# EAGLE board Vorlage ATmega2560-16AU (EAGLE 9.6.2)

Size 160 x 100 mm. Coordinates in mm from the lower left corner, seen from the top.
Outline: 150,0 160,0 160,100
Outline: 150,0 0,0 0,100 150,100 150,0
Copper layers (1*16): Top 0.035mm / dielectric 1.5mm / Bottom 0.035mm
Design rules "default": minimum track width 6mil, minimum drill 0.35mm, track to track 6mil, track to pad 6mil, pad to pad 6mil, via to via 6mil, smd to smd 6mil, copper to edge 40mil, drill to drill 6mil, minimum pad ring 10mil, minimum via ring 8mil, stop-mask expansion 4mil, vias tented up to drill 0mil, thermal gap 10mil
Net classes: 0 default: width 0.254 mm, drill 0.508 mm; 1 POWER: width 1.016 mm, drill 1.016 mm

## Footprints (pad centres in the part's own frame; a part is rotated, then mirrored left to right if it is on the bottom)
LSP11 = drill 0.6 pad 1.016 octagon: MP 0,0
CHIPLED_1206 = smd 1.5 x 1.5: A 0,-1.75; C 0,1.75
C1206 = smd 1.6 x 1.8: 1 -1.4,0; 2 1.4,0
C0805K = smd 1.3 x 1.6: 1 -1,0; 2 1,0
UD-6,3X5,8_NICHICON = smd 3.556 x 1: + 3.62,0; - -3.62,0
C0805 = smd 1.3 x 1.5: 1 -0.95,0; 2 0.95,0
SOD123 = smd 1.4 x 1.4: A 1.9,0; C -1.9,0
F1206 = smd 1.6 x 1.803: 1 -1.422,0; 2 1.422,0
SO14 = smd 0.66 x 2.032: 1 -3.81,-3.073; 2 -2.54,-3.073; 3 -1.27,-3.073; 4 0,-3.073; 5 1.27,-3.073; 6 2.54,-3.073; 7 3.81,-3.073; 8 3.81,3.073; 9 2.54,3.073; 10 1.27,3.073; 11 0,3.073; 12 -1.27,3.073; 13 -2.54,3.073; 14 -3.81,3.073
TQFP100 = smd 1.5 x 0.3: 1 -8,6; 2 -8,5.5; 3 -8,5; 4 -8,4.5; 5 -8,4; 6 -8,3.5; 7 -8,3; 8 -8,2.5; 9 -8,2; 10 -8,1.5; 11 -8,1; 12 -8,0.5; 13 -8,0; 14 -8,-0.5; 15 -8,-1; 16 -8,-1.5; 17 -8,-2; 18 -8,-2.5; 19 -8,-3; 20 -8,-3.5; 21 -8,-4; 22 -8,-4.5; 23 -8,-5; 24 -8,-5.5; 25 -8,-6; 51 8,-6; 52 8,-5.5; 53 8,-5; 54 8,-4.5; 55 8,-4; 56 8,-3.5; 57 8,-3; 58 8,-2.5; 59 8,-2; 60 8,-1.5; 61 8,-1; 62 8,-0.5; 63 8,0; 64 8,0.5; 65 8,1; 66 8,1.5; 67 8,2; 68 8,2.5; 69 8,3; 70 8,3.5; 71 8,4; 72 8,4.5; 73 8,5; 74 8,5.5; 75 8,6 | smd 0.3 x 1.5: 26 -6,-8; 27 -5.5,-8; 28 -5,-8; 29 -4.5,-8; 30 -4,-8; 31 -3.5,-8; 32 -3,-8; 33 -2.5,-8; 34 -2,-8; 35 -1.5,-8; 36 -1,-8; 37 -0.5,-8; 38 0,-8; 39 0.5,-8; 40 1,-8; 41 1.5,-8; 42 2,-8; 43 2.5,-8; 44 3,-8; 45 3.5,-8; 46 4,-8; 47 4.5,-8; 48 5,-8; 49 5.5,-8; 50 6,-8; 76 6,8; 77 5.5,8; 78 5,8; 79 4.5,8; 80 4,8; 81 3.5,8; 82 3,8; 83 2.5,8; 84 2,8; 85 1.5,8; 86 1,8; 87 0.5,8; 88 0,8; 89 -0.5,8; 90 -1,8; 91 -1.5,8; 92 -2,8; 93 -2.5,8; 94 -3,8; 95 -3.5,8; 96 -4,8; 97 -4.5,8; 98 -5,8; 99 -5.5,8; 100 -6,8
SOT23-W = smd 1.27 x 1.524: 1 -1.1,-1.554; 2 1.1,-1.554 | smd 1.778 x 1.524: 3 0,1.554
SO16 = smd 0.66 x 2.032: 1 -4.445,-3.073; 2 -3.175,-3.073; 3 -1.905,-3.073; 4 -0.635,-3.073; 5 0.635,-3.073; 6 1.905,-3.073; 7 3.175,-3.073; 8 4.445,-3.073; 9 4.445,3.073; 10 3.175,3.073; 11 1.905,3.073; 12 0.635,3.073; 13 -0.635,3.073; 14 -1.905,3.073; 15 -3.175,3.073; 16 -4.445,3.073
SOT23-DBV = smd 0.55 x 1.2: 1 -0.95,-1.3; 2 0,-1.3; 3 0.95,-1.3; 4 0.95,1.3; 5 -0.95,1.3
JP2 = drill 0.914 long: 1 -2.54,0; 2 0,0; 3 2.54,0
SAMTEC_FTS-105-01-L-D = drill 0.7 pad 1.067 square: 1 -5.08,-1.27 | drill 0.7 pad 1.067: 2 -5.08,0; 3 -3.81,-1.27; 4 -3.81,0; 5 -2.54,-1.27; 6 -2.54,0; 7 -1.27,-1.27; 8 -1.27,0; 9 0,-1.27; 10 0,0
L2825P = smd 1.4 x 2.4: 1 -1.2,0; 2 1.2,0
EADIP203-4SMD = smd 1.67 x 0.89: 1 -29.38,-9.92; 2 -26.13,-7.92; 3 -29.38,-5.92; 4 -26.13,-3.92; 5 -29.38,-1.92; 6 -26.13,0.08; 7 -29.38,2.08; 8 -26.13,4.08; 9 -29.38,6.08; 10 34.12,6.08; 11 37.37,4.08; 12 34.12,2.08; 13 37.37,0.08; 14 34.12,-1.92; 15 37.37,-3.92; 16 34.12,-5.92; 17 37.37,-7.92; 18 34.12,-9.92
HC49UP = smd 5.334 x 1.93: 1 -4.826,0; 2 4.826,0
TC38H = drill 0.813: 1 -1.27,0; 2 1.27,0
SOT23 = smd 1 x 1.4: 1 -0.95,-1.1; 2 0.95,-1.1; 3 0,1.1
EVUF = drill 1.1 pad 1.676: 1 -2.5,-7; 2 0,-7; 3 2.5,-7 | drill 2.2 square: M1 4.5,0; M2 -4.5,0
R1206 = smd 1.6 x 1.803: 1 -1.422,0; 2 1.422,0
3223G = smd 2 x 0.9: 1 -2.2,1.4; 3 -2.2,-1.4 | smd 2 x 1.3: 2 2.2,0
R0805 = smd 1.3 x 1.5: 1 -0.95,0; 2 0.95,0
LED_MIT_DIFUSOR = smd 0.7 x 1.65: 1 -0.95,-1.675; 3 0.95,-1.675; 4 0.95,1.675; 6 -0.95,1.675 | smd 0.6 x 1.65: 2 0,-1.675; 5 0,1.675 | hole 1.5: -3.175,0; 3.175,0
TS42_4PAD = smd 2.54 x 1.4: 1 -4.454,2.25; 2 4.454,2.25; 3 -4.454,-2.25; 4 4.454,-2.25
SPDT_5MM = drill 1 pad 1.422 long: 1 0,-2.5; 2 0,0; 3 0,2.5
TO127P254X495-3P = drill 0.991: 1 -2.54,-2.54 | drill 0.991 square: 2 -1.27,0; 3 0,-2.54
RKJXV1224005 = drill 1.2 pad 1.8: 1 -3.25,-5.75; 2 -3.25,-10.25; 3 3.25,-5.75; 4 3.25,-10.25; 5 8.73,-2.5; 6 8.73,0; 7 8.73,2.5; 8 2.5,8.73; 9 0,8.73; 10 -2.5,8.73 | drill 1.5 pad 2.25: 11 -6.325,5; 12 6.325,5; 15 -6.325,-5; 16 6.325,-5
USB-C = smd 0.762 x 2: 1 -2.75,2.848; 6 2.75,2.848 | smd 0.559 x 2: 2 -1.5,2.848; 3 -0.5,2.848; 4 0.5,2.848; 5 1.5,2.848 | drill 1.1 pad 1.6: P$1 -4.3,2.1; P$2 4.3,2.1 | drill 1 pad 2: P$3 -4.3,-1.7; P$4 4.3,-1.7
SOD232-W = smd 1.5 x 1.2: C 1.45,0; E -1.45,0
PAK100/2500-10 = drill 1 pad 1.422: 1 -5.08,-1.27; 2 -5.08,1.27; 3 -2.54,-1.27; 4 -2.54,1.27; 5 0,-1.27; 6 0,1.27; 7 2.54,-1.27; 8 2.54,1.27; 9 5.08,-1.27; 10 5.08,1.27
MKDSN1,5/2-5,08 = drill 1.3 pad 2: 1.1 -2.561,0.025; 2.1 2.519,0.025 | drill 1.3 long: 1.2 -1.905,3.81; 2.2 1.905,3.81
PAK100/2500-14 = drill 1 pad 1.422: 1 -7.62,-1.27; 2 -7.62,1.27; 3 -5.08,-1.27; 4 -5.08,1.27; 5 -2.54,-1.27; 6 -2.54,1.27; 7 0,-1.27; 8 0,1.27; 9 2.54,-1.27; 10 2.54,1.27; 11 5.08,-1.27; 12 5.08,1.27; 13 7.62,-1.27; 14 7.62,1.27

## Placement (x,y rotation side)
3.3V  3.3V  [LSP11]  -60,-280 0 top  (outside the outline)
+5V-POWER  Gruen  [CHIPLED_1206]  -80,-190 0 top  (outside the outline)
C1  100nF  [C1206]  -80,-260 0 top  (outside the outline)
C2  100nF  [C1206]  -70,-260 0 top  (outside the outline)
C3  100nF  [C1206]  -17.78,129.54 0 top  (outside the outline)
C4  100nF  [C1206]  -25.4,129.54 0 top  (outside the outline)
C5  100nF  [C1206]  -33.02,129.54 0 top  (outside the outline)
C6  100nF  [C1206]  -60,-260 0 top  (outside the outline)
C7  100nF  [C1206]  -48.26,129.54 0 top  (outside the outline)
C8  18pF  [C0805K]  -107.95,142.24 0 top  (outside the outline)
C9  18pF  [C0805K]  -113.03,142.24 0 top  (outside the outline)
C10  100nF  [C1206]  -50,-260 0 top  (outside the outline)
C11  100nF  [C1206]  -40,-260 0 top  (outside the outline)
C12  100nF  [C1206]  -71.12,129.54 0 top  (outside the outline)
C13  100nF  [C1206]  -78.74,129.54 0 top  (outside the outline)
C14  100uF  [UD-6,3X5,8_NICHICON]  -30,-210 0 top  (outside the outline)
C15  100nF  [C1206]  -30,-260 0 top  (outside the outline)
C16  100nF  [C1206]  -20,-260 0 top  (outside the outline)
C17  12pF  [C0805K]  -118.11,142.24 0 top  (outside the outline)
C18  12pF  [C0805K]  -123.19,142.24 0 top  (outside the outline)
C19  1uF  [C1206]  -50,-270 0 top  (outside the outline)
C20  1uF  [C1206]  -40,-270 0 top  (outside the outline)
C21  100nF  [C1206]  -10,-260 0 top  (outside the outline)
C22  1uF  [C1206]  -30,-270 0 top  (outside the outline)
C23  100nF  [C1206]  -130,-270 0 top  (outside the outline)
C24  100uF  [UD-6,3X5,8_NICHICON]  -10,-210 0 top  (outside the outline)
C25  100uF  [UD-6,3X5,8_NICHICON]  -120,-230 0 top  (outside the outline)
C26  100nF  [C1206]  -130,-290 0 top  (outside the outline)
C27  22nF  [C0805]  -130,-380 0 top  (outside the outline)
D1  [SOD123]  -130,-330 0 top  (outside the outline)
D2  [SOD123]  -130,-340 0 top  (outside the outline)
F1  2A  [F1206]  -90,-280 0 top  (outside the outline)
F2  2A  [F1206]  -80,-280 0 top  (outside the outline)
H0  blau  [CHIPLED_1206]  -57.15,142.24 0 top  (outside the outline)
H1  blau  [CHIPLED_1206]  -63.5,142.24 0 top  (outside the outline)
H2  blau  [CHIPLED_1206]  -69.85,142.24 0 top  (outside the outline)
H3  blau  [CHIPLED_1206]  -76.2,142.24 0 top  (outside the outline)
H4  blau  [CHIPLED_1206]  -82.55,142.24 0 top  (outside the outline)
H5  blau  [CHIPLED_1206]  -88.9,142.24 0 top  (outside the outline)
H6  blau  [CHIPLED_1206]  -95.25,142.24 0 top  (outside the outline)
H7  blau  [CHIPLED_1206]  -101.6,142.24 0 top  (outside the outline)
H8  blau  [CHIPLED_1206]  -80,-130 0 top  (outside the outline)
H9  blau  [CHIPLED_1206]  -90,-130 0 top  (outside the outline)
H10  blau  [CHIPLED_1206]  -100,-130 0 top  (outside the outline)
H11  blau  [CHIPLED_1206]  -110,-130 0 top  (outside the outline)
H12  blau  [CHIPLED_1206]  -120,-130 0 top  (outside the outline)
H13  blau  [CHIPLED_1206]  -130,-130 0 top  (outside the outline)
H14  blau  [CHIPLED_1206]  -80,-120 0 top  (outside the outline)
H15  blau  [CHIPLED_1206]  -90,-120 0 top  (outside the outline)
IC1  CD74HC14PW  [SO14]  -80,-220 0 top  (outside the outline)
IC2  ATMEGA2560640V-8AU  [TQFP100]  -30.48,38.1 0 top  (outside the outline)
IC3  SS39E  [SOT23-W]  -110,-220 0 top  (outside the outline)
IC4  SS39E  [SOT23-W]  -100,-220 0 top  (outside the outline)
IC5  74AC138D  [SO16]  -60,-220 0 top  (outside the outline)
IC6  XC6210B332MR  [SOT23-DBV]  -70,-240 0 top  (outside the outline)
JP1  Power Select  [JP2]  -120,-260 0 top  (outside the outline)
JP2  SERVO_1  [JP2]  -100,-260 0 top  (outside the outline)
JP3  SERVO_2  [JP2]  -90,-260 0 top  (outside the outline)
JTAG  3220-10-0100-00  [SAMTEC_FTS-105-01-L-D]  -60,-190 0 top  (outside the outline)
L1  10uH  [L2825P]  -69.85,121.92 0 top  (outside the outline)
LCD1  EADIP203-4_SMD  [EADIP203-4SMD]  -90,-160 0 top  (outside the outline)
LSP1  LSP11  [LSP11]  -129.54,140.97 0 top  (outside the outline)
LSP2  LSP11  [LSP11]  -16.51,147.32 0 top  (outside the outline)
LSP3  LSP11  [LSP11]  -22.86,147.32 0 top  (outside the outline)
Q1  16MHz  [HC49UP]  -30.48,102.87 0 top  (outside the outline)
Q2  32.768kHz  [TC38H]  -96.52,68.58 0 top  (outside the outline)
Q3  PMV27UPER  [SOT23]  -50,-240 0 top  (outside the outline)
Q4  PMV27UPER  [SOT23]  -30,-240 0 top  (outside the outline)
Q5  PMV27UPER  [SOT23]  -130,-250 0 top  (outside the outline)
Q6  PMV27UPER  [SOT23]  -110,-250 0 top  (outside the outline)
Q7  PMV27UPER  [SOT23]  -90,-250 0 top  (outside the outline)
Q8  PMV27UPER  [SOT23]  -70,-250 0 top  (outside the outline)
Q9  PMV27UPER  [SOT23]  -50,-250 0 top  (outside the outline)
Q10  PMV27UPER  [SOT23]  -30,-250 0 top  (outside the outline)
R1  10k  [EVUF]  -20,-160 0 top  (outside the outline)
R2  150R  [R1206]  -115.57,129.54 0 top  (outside the outline)
R3  100k  [R1206]  -110,-270 0 top  (outside the outline)
R4  100k  [R1206]  -100,-270 0 top  (outside the outline)
R5  150R  [R1206]  -121.92,129.54 0 top  (outside the outline)
R6  10k  [EVUF]  -120,-190 0 top  (outside the outline)
R7  150R  [R1206]  -128.27,129.54 0 top  (outside the outline)
R8  100k  [R1206]  -90,-270 0 top  (outside the outline)
R9  100k  [R1206]  -80,-270 0 top  (outside the outline)
R10  10k  [R1206]  -125.73,135.89 0 top  (outside the outline)
R11  1k  [R1206]  -20,-270 0 top  (outside the outline)
R12  1k  [R1206]  -10,-270 0 top  (outside the outline)
R13  2k5  [3223G]  -90,-240 0 top  (outside the outline)
R14  1k  [R1206]  -130,-280 0 top  (outside the outline)
R15  2k  [R1206]  -120,-280 0 top  (outside the outline)
R16  2k  [R1206]  -110,-280 0 top  (outside the outline)
R17  150R  [R1206]  -120,-270 0 top  (outside the outline)
R18  150R  [R1206]  -110,-110 0 top  (outside the outline)
R19  150R  [R1206]  -100,-110 0 top  (outside the outline)
R20  150R  [R1206]  -90,-110 0 top  (outside the outline)
R21  150R  [R1206]  -80,-110 0 top  (outside the outline)
R22  150R  [R1206]  -130,-120 0 top  (outside the outline)
R23  150R  [R1206]  -120,-120 0 top  (outside the outline)
R24  150R  [R1206]  -110,-120 0 top  (outside the outline)
R25  150R  [R1206]  -100,-120 0 top  (outside the outline)
R26  100k  [R1206]  -70,-270 0 top  (outside the outline)
R27  50k  [3223G]  -80,-240 0 top  (outside the outline)
R28  10k  [R1206]  -100,-280 0 top  (outside the outline)
R29  150R  [R1206]  -22.86,135.89 0 top  (outside the outline)
R30  150R  [R1206]  -29.21,135.89 0 top  (outside the outline)
R31  150R  [R1206]  -35.56,135.89 0 top  (outside the outline)
R32  150R  [R1206]  -41.91,135.89 0 top  (outside the outline)
R33  150R  [R1206]  -48.26,135.89 0 top  (outside the outline)
R34  150R  [R1206]  -54.61,135.89 0 top  (outside the outline)
R35  150R  [R1206]  -60.96,135.89 0 top  (outside the outline)
R36  150R  [R1206]  -67.31,135.89 0 top  (outside the outline)
R37  5.1k  [R0805]  -130,-300 0 top  (outside the outline)
R38  5.1k  [R0805]  -130,-310 0 top  (outside the outline)
R39  470  [R0805]  -130,-350 0 top  (outside the outline)
R40  470  [R0805]  -130,-360 0 top  (outside the outline)
R41  50k  [3223G]  -120,-370 0 top  (outside the outline)
R45  100k  [R1206]  -60,-270 0 top  (outside the outline)
RGB1  LED  [LED_MIT_DIFUSOR]  -17.78,102.87 0 top  (outside the outline)
S1  [TS42_4PAD]  -40,-220 0 top  (outside the outline)
S2  [TS42_4PAD]  -20,-220 0 top  (outside the outline)
S3  [TS42_4PAD]  -120,-240 0 top  (outside the outline)
S4  [TS42_4PAD]  -100,-240 0 top  (outside the outline)
S5  TL36POSPDT_5MM  [SPDT_5MM]  -85.09,38.1 0 top  (outside the outline)
S6  TL36POSPDT_5MM  [SPDT_5MM]  -110.49,38.1 0 top  (outside the outline)
S7  TL36POSPDT_5MM  [SPDT_5MM]  -33.02,58.42 0 top  (outside the outline)
S8  TL36POSPDT_5MM  [SPDT_5MM]  -58.42,58.42 0 top  (outside the outline)
S9  TL36POSPDT_5MM  [SPDT_5MM]  -83.82,58.42 0 top  (outside the outline)
S10  TL36POSPDT_5MM  [SPDT_5MM]  -109.22,58.42 0 top  (outside the outline)
S11  TL36POSPDT_5MM  [SPDT_5MM]  -33.02,76.2 0 top  (outside the outline)
S12  TL36POSPDT_5MM  [SPDT_5MM]  -58.42,76.2 0 top  (outside the outline)
S13  [TS42_4PAD]  -120,-390 0 top  (outside the outline)
U1  LM35DZ  [TO127P254X495-3P]  -20,-180 0 top  (outside the outline)
U$1  JOYSTICK  [RKJXV1224005]  -40,-160 0 top  (outside the outline)
U$2  USB-C_POWER  [USB-C]  -100,-190 0 top  (outside the outline)
U$3  ALS-PT17  [SOD232-W]  -70,-280 0 top  (outside the outline)
V1  PMV20EN  [SOT23]  -33.02,121.92 0 top  (outside the outline)
V2  PMV20EN  [SOT23]  -43.18,121.92 0 top  (outside the outline)
V3  PMV20EN  [SOT23]  -53.34,121.92 0 top  (outside the outline)
V4  PMV20EN  [SOT23]  -10,-250 0 top  (outside the outline)
V5  PMV20EN  [SOT23]  -130,-20 0 top  (outside the outline)
V6  PMV20EN  [SOT23]  -130,-30 0 top  (outside the outline)
V7  PMV20EN  [SOT23]  -130,-40 0 top  (outside the outline)
V8  PMV20EN  [SOT23]  -130,-50 0 top  (outside the outline)
V9  PMV20EN  [SOT23]  -130,-60 0 top  (outside the outline)
V10  PMV20EN  [SOT23]  -130,-70 0 top  (outside the outline)
V11  PMV20EN  [SOT23]  -130,-80 0 top  (outside the outline)
V12  PMV20EN  [SOT23]  -130,-90 0 top  (outside the outline)
V13  PMV20EN  [SOT23]  -130,-100 0 top  (outside the outline)
V14  PMV20EN  [SOT23]  -120,-100 0 top  (outside the outline)
V15  PMV20EN  [SOT23]  -110,-100 0 top  (outside the outline)
V16  PMV20EN  [SOT23]  -100,-100 0 top  (outside the outline)
V17  PMV20EN  [SOT23]  -90,-100 0 top  (outside the outline)
V18  PMV20EN  [SOT23]  -80,-100 0 top  (outside the outline)
V19  PMV20EN  [SOT23]  -130,-110 0 top  (outside the outline)
V20  PMV20EN  [SOT23]  -120,-110 0 top  (outside the outline)
V21  PMV20EN  [SOT23]  -130,-320 0 top  (outside the outline)
X1  2510-  [PAK100/2500-10]  -80,-210 0 top  (outside the outline)
X2  +5V  [MKDSN1,5/2-5,08]  -40,-190 0 top  (outside the outline)
X3  2514-  [PAK100/2500-14]  -110,-210 0 top  (outside the outline)
X4  2510-  [PAK100/2500-10]  -50,-210 0 top  (outside the outline)
X5  2510-  [PAK100/2500-10]  -120,-140 0 top  (outside the outline)

## Library data of the parts
3.3V LSP1-LSP3 = solpad
+5V-POWER H0 H1-H15 RGB1 = led
C1-C13 C15-C23 C26 C27 = rcl; SPICEPREFIX: C
C14 C24 C25 = rcl2
D1 D2 = diode
F1 F2 = fuse
IC1 IC5 = 74xx-eu
IC2 = SmartPrj-B
IC3 IC4 = allegro-2; MF: ALLEGRO MICROSYSTEMS, INC.; MPN: A1301ELHLT-T; OC_FARNELL: 1198084; OC_NEWARK: 31K6634
IC6 S1-S4 S13 = SmartPrj
JP1-JP3 = jumper_l
JTAG = JTAG_10pol_50mil; DESCRIPTION: CONN HEADER, 1.27MM, THRU HOLE, 10WAY; MPN: FTS-105-01-L-D; OCFARNELL: 1667728; OCNEWARK: 11P4652; PACKAGE: HEADER, 1.27MM, THRU HOLE, 10WAY; SUPPLIER: Samtec
L1 = rcl; SPICEPREFIX: L
LCD1 = display-lcd
Q1 Q2 = crystal; OC_FARNELL: unknown; OC_NEWARK: unknown
Q3-Q10 = transistor-small-signal
R1 R6 = pot-Sirius
R2-R5 R7-R12 R14-R26 R28-R36 R45 = rcl; SPICEPREFIX: R
R13 R27 R41 = pot
R37-R40 = rcl
S5-S12 = switch
U1 = Temp_Sensor LM35; MPN: LM35DZ; OC_FARNELL: 9488200; OC_NEWARK: 92F288; PACKAGE: TO-92; SUPPLIER: TEXAS INSTRUMENTS
U$1 = Joystick
U$2 = USB
U$3 = Lichtsensor
V1-V21 = transistor-fet-mit-BSS138
X1 X4 X5 = con-3m; MF: 3M; MPN: 2510-6002UB; OC_FARNELL: 9838244; OC_NEWARK: 46F4725
X2 = con_sirius; MPN: MKDSN 1,5/2-5.08; OC_FARNELL: 1792903; OC_NEWARK: 30M2397
X3 = con-3m; OC_FARNELL: unknown; OC_NEWARK: unknown

## Nets
3.3V: 3.3V.MP C15.1 C22.1 IC6.5 LCD1.2 R13.2 R13.3
ADC8: IC2.89 R1.2
ADC9: IC2.88 R6.2
ADC10: IC2.87 U$1.9
ADC11: IC2.86 U$1.6
ADC12: C19.2 IC2.85 R26.1
ADC13: IC2.84 U1.2
ADC14: IC2.83 IC3.2
ADC15: IC2.82 IC4.2
GND [POWER]: C1.2 C2.2 C3.1 C4.2 C5.2 C6.2 C7.2 C8.1 C9.2 C10.2 C11.2 C12.2 C13.1 C14.- C15.2 C16.2 C17.2 C18.2 C19.1 C20.2 C21.2 C22.2 C23.2 C24.- C25.- C26.2 C27.2 IC1.7 IC2.11 IC2.32 IC2.62 IC2.81 IC2.99 IC3.3 IC4.3 IC5.4 IC5.5 IC5.8 IC6.2 JP2.3 JP3.3 JTAG.2 JTAG.10 LCD1.1 LCD1.4 R1.1 R1.M1 R1.M2 R6.1 R6.M1 R6.M2 R15.1 R16.1 R28.1 R37.1 R38.1 S1.3 S1.4 S2.3 S2.4 S3.1 S3.2 S4.1 S4.2 S5.3 S6.3 S7.3 S8.3 S9.3 S10.3 S11.3 S12.3 S13.1 S13.2 U1.3 U$1.1 U$1.3 U$1.7 U$1.10 U$1.11 U$1.12 U$1.15 U$1.16 U$2.1 U$2.6 V1.2 V2.2 V3.2 V4.2 V21.2 X1.10 X2.1.1 X2.1.2 X3.6 X3.12 X4.10 X5.10
H1: H15.C R19.2
H7: H7.C R29.2
LED_GND [POWER]: +5V-POWER.C V5.2 V6.2 V7.2 V8.2 V9.2 V10.2 V11.2 V12.2 V13.2 V14.2 V15.2 V16.2 V17.2 V18.2 V19.2 V20.2 V21.3
N$1: R7.2 RGB1.1
N$2: R5.2 RGB1.2
N$3 [POWER]: F1.2 JP1.1
N$4 [POWER]: F2.2 JP1.3
N$5: R36.1 V5.3
N$6: R35.1 V6.3
N$7: R34.1 V7.3
N$8: R38.2 U$2.3
N$9: C23.1 IC1.3 R45.1 U$1.2 U$1.4
N$10: R37.2 U$2.4
N$11: R2.2 RGB1.3
N$12: LCD1.18 V4.3
N$13: R33.1 V8.3
N$14: R32.1 V9.3
N$15: R31.1 V10.3
N$16: R30.1 V11.3
N$17: R29.1 V12.3
N$18: IC2.7 LSP3.MP
N$19: R26.2 R27.1 U$3.E
N$20: R27.2 R27.3 R28.2
N$21: C1.1 IC1.13 R3.2 S1.1 S1.2
N$22: C2.1 IC1.11 R4.2 S2.1 S2.2
N$23: C11.1 IC1.1 R9.1 S4.3 S4.4
N$24: C10.1 IC1.9 R8.1 S3.3 S3.4
N$25: C9.1 IC2.34 Q1.1
N$26: C3.2 IC2.100 L1.2
N$27: R2.1 V1.3
N$28: R5.1 V2.3
N$29: R7.1 V3.3
N$30: C13.2 IC2.98
N$31 [POWER]: F2.1 U$2.2 U$2.5
N$32: C17.1 IC2.29 Q2.1
N$33: H6.C R30.2
N$34: LCD1.3 R13.1
N$35: C18.1 IC2.28 Q2.2
N$36: D1.C D2.A IC1.6 V21.1
N$37: C8.2 IC2.33 Q1.2
N$38: D1.A R39.1
N$39: LCD1.6 R12.1 R15.2
N$40: LCD1.5 R14.1 R16.2
N$41: D2.C R40.1
N$42: R39.2 R41.1
N$43: R40.2 R41.3
N$44: C27.1 IC1.5 R41.2
N$46: H14.C R18.2
N$47: H12.C R20.2
N$48: H2.C R34.2
N$49: H4.C R32.2
N$50: H5.C R31.2
N$51: H13.C R21.2
N$52: H10.C R22.2
N$53: H3.C R33.2
N$55: H11.C R23.2
N$56: H8.C R24.2
N$57: H0.C R36.2
N$58: H1.C R35.2
N$59: H9.C R25.2
N$60: +5V-POWER.A R11.1
N$61: R24.1 V13.3
N$63: R25.1 V14.3
N$64: R22.1 V15.3
N$65: R23.1 V16.3
N$66: R20.1 V17.3
N$67: R21.1 V18.3
N$68: R18.1 V19.3
N$69: R19.1 V20.3
N$70: C21.1 IC6.4
N$75 [POWER]: F1.1 X2.2.1 X2.2.2
N$95: LCD1.17 R17.1
N$102: IC5.15 Q10.1
N$103: Q10.3 X3.1
N$104: IC5.14 Q9.1
N$105: IC5.13 Q8.1
N$106: IC5.12 Q7.1
N$107: IC5.11 Q6.1
N$108: IC5.10 Q5.1
N$109: IC5.9 Q4.1
N$110: IC5.7 Q3.1
N$111: Q9.3 X3.3
N$112: Q3.3 X3.4
N$113: Q8.3 X3.5
N$114: Q7.3 X3.7
N$115: Q6.3 X3.9
N$116: Q5.3 X3.11
N$117: Q4.3 X3.13
PA0: IC2.78 V5.1
PA1: IC2.77 V6.1
PA2: IC2.76 V7.1
PA3: IC2.75 V8.1
PA4: IC2.74 V9.1
PA5: IC2.73 V10.1
PA6: IC2.72 V11.1
PA7: IC2.71 V12.1
PB0: IC2.19 V13.1 X5.1
PB1: IC2.20 V14.1 X5.2
PB2: IC2.21 V15.1 X5.3
PB3: IC2.22 V16.1 X5.4
PB4: IC2.23 V17.1 X5.5
PB5: IC2.24 V18.1 X5.6
PB6: IC2.25 V19.1 X5.7
PB7: IC2.26 V20.1 X5.8
PC0: IC2.53 S5.2
PC1: IC2.54 S6.2
PC2: IC2.55 S7.2
PC3: IC2.56 S8.2
PC4: IC2.57 S9.2
PC5: IC2.58 S10.2
PC6: IC2.59 S11.2
PC7: IC2.60 S12.2
PD0: IC2.43 X1.1
PD1: IC2.44 X1.2
PD2: IC2.45 X1.3
PD3: IC2.46 X1.4
PD4: IC2.47 X1.5
PD5: IC2.48 X1.6
PD6: IC2.49 X1.7
PD7: IC2.50 X1.8
PE0: IC2.2 LSP2.MP
PE1: IC2.3 LSP1.MP
PE2: IC1.4 IC2.4
PE3: IC2.5 JP2.1
PE4: IC2.6 JP3.1
PF0: IC2.97 X4.1
PF1: IC2.96 X4.2
PF2: IC2.95 X4.3
PF3: IC2.94 X4.4
PF4: IC2.93 JTAG.1
PF5: IC2.92 JTAG.5
PF6: IC2.91 JTAG.3
PF7: IC2.90 JTAG.9
PG0: IC2.51 JTAG.7 R14.2
PG1: IC2.52 JTAG.8 R12.2
PG5: IC2.1 V4.1
PH3: IC2.15 V1.1
PH4: IC2.16 V2.1
PH5: IC2.17 V3.1
PJ0: IC2.63 IC5.1
PJ1: IC2.64 IC5.2
PJ2: IC2.65 IC5.3
PJ3: IC2.66 IC5.6
PJ4: IC2.67 X3.2
PJ5: IC2.68 X3.8
PJ6: IC2.69 X3.10
PL0: IC1.12 IC2.35
PL1: IC1.10 IC2.36
PL2: IC2.37 X4.5
PL3: IC2.38 X4.6
PL4: IC2.39 X4.7
PL5: IC2.40 X4.8
PL6: IC1.8 IC2.41
PL7: IC1.2 IC2.42
RESET: IC2.30 JTAG.6 R10.1 S13.3 S13.4
VCC [POWER]: C4.1 C5.1 C6.1 C7.1 C12.1 C14.+ C16.1 C20.1 C24.+ C25.+ C26.1 H0.A H1.A H2.A H3.A H4.A H5.A H6.A H7.A H8.A H9.A H10.A H11.A H12.A H13.A H14.A H15.A IC1.14 IC2.10 IC2.31 IC2.61 IC2.80 IC3.1 IC4.1 IC5.16 IC6.1 IC6.3 JP1.2 JP2.2 JP3.2 JTAG.4 L1.1 Q3.2 Q4.2 Q5.2 Q6.2 Q7.2 Q8.2 Q9.2 Q10.2 R1.3 R3.1 R4.1 R6.3 R8.2 R9.2 R10.2 R11.2 R17.2 R45.2 RGB1.4 RGB1.5 RGB1.6 S5.1 S6.1 S7.1 S8.1 S9.1 S10.1 S11.1 S12.1 U1.1 U$1.5 U$1.8 U$3.C X1.9 X3.14 X4.9 X5.9

## Tracks (layer width: path | path; a pad name or v marks a point on that pad's centre or on a via)
3.3V  (6 unrouted)
ADC8  (1 unrouted)
ADC9  (1 unrouted)
ADC10  (1 unrouted)
ADC11  (1 unrouted)
ADC12  (2 unrouted)
ADC13  (1 unrouted)
ADC14  (1 unrouted)
ADC15  (1 unrouted)
GND  (96 unrouted)
H1  (1 unrouted)
H7  (1 unrouted)
LED_GND  (17 unrouted)
N$1  (1 unrouted)
N$2  (1 unrouted)
N$3  (1 unrouted)
N$4  (1 unrouted)
N$5  (1 unrouted)
N$6  (1 unrouted)
N$7  (1 unrouted)
N$8  (1 unrouted)
N$9  (4 unrouted)
N$10  (1 unrouted)
N$11  (1 unrouted)
N$12  (1 unrouted)
N$13  (1 unrouted)
N$14  (1 unrouted)
N$15  (1 unrouted)
N$16  (1 unrouted)
N$17  (1 unrouted)
N$18  (1 unrouted)
N$19  (2 unrouted)
N$20  (2 unrouted)
N$21  (4 unrouted)
N$22  (4 unrouted)
N$23  (4 unrouted)
N$24  (4 unrouted)
N$25  (2 unrouted)
N$26  (2 unrouted)
N$27  (1 unrouted)
N$28  (1 unrouted)
N$29  (1 unrouted)
N$30  (1 unrouted)
N$31  (2 unrouted)
N$32  (2 unrouted)
N$33  (1 unrouted)
N$34  (1 unrouted)
N$35  (2 unrouted)
N$36  (3 unrouted)
N$37  (2 unrouted)
N$38  (1 unrouted)
N$39  (2 unrouted)
N$40  (2 unrouted)
N$41  (1 unrouted)
N$42  (1 unrouted)
N$43  (1 unrouted)
N$44  (2 unrouted)
N$46  (1 unrouted)
N$47  (1 unrouted)
N$48  (1 unrouted)
N$49  (1 unrouted)
N$50  (1 unrouted)
N$51  (1 unrouted)
N$52  (1 unrouted)
N$53  (1 unrouted)
N$55  (1 unrouted)
N$56  (1 unrouted)
N$57  (1 unrouted)
N$58  (1 unrouted)
N$59  (1 unrouted)
N$60  (1 unrouted)
N$61  (1 unrouted)
N$63  (1 unrouted)
N$64  (1 unrouted)
N$65  (1 unrouted)
N$66  (1 unrouted)
N$67  (1 unrouted)
N$68  (1 unrouted)
N$69  (1 unrouted)
N$70  (1 unrouted)
N$75  (2 unrouted)
N$95  (1 unrouted)
N$102  (1 unrouted)
N$103  (1 unrouted)
N$104  (1 unrouted)
N$105  (1 unrouted)
N$106  (1 unrouted)
N$107  (1 unrouted)
N$108  (1 unrouted)
N$109  (1 unrouted)
N$110  (1 unrouted)
N$111  (1 unrouted)
N$112  (1 unrouted)
N$113  (1 unrouted)
N$114  (1 unrouted)
N$115  (1 unrouted)
N$116  (1 unrouted)
N$117  (1 unrouted)
PA0  (1 unrouted)
PA1  (1 unrouted)
PA2  (1 unrouted)
PA3  (1 unrouted)
PA4  (1 unrouted)
PA5  (1 unrouted)
PA6  (1 unrouted)
PA7  (1 unrouted)
PB0  (2 unrouted)
PB1  (2 unrouted)
PB2  (2 unrouted)
PB3  (2 unrouted)
PB4  (2 unrouted)
PB5  (2 unrouted)
PB6  (2 unrouted)
PB7  (2 unrouted)
PC0  (1 unrouted)
PC1  (1 unrouted)
PC2  (1 unrouted)
PC3  (1 unrouted)
PC4  (1 unrouted)
PC5  (1 unrouted)
PC6  (1 unrouted)
PC7  (1 unrouted)
PD0  (1 unrouted)
PD1  (1 unrouted)
PD2  (1 unrouted)
PD3  (1 unrouted)
PD4  (1 unrouted)
PD5  (1 unrouted)
PD6  (1 unrouted)
PD7  (1 unrouted)
PE0  (1 unrouted)
PE1  (1 unrouted)
PE2  (1 unrouted)
PE3  (1 unrouted)
PE4  (1 unrouted)
PF0  (1 unrouted)
PF1  (1 unrouted)
PF2  (1 unrouted)
PF3  (1 unrouted)
PF4  (1 unrouted)
PF5  (1 unrouted)
PF6  (1 unrouted)
PF7  (1 unrouted)
PG0  (2 unrouted)
PG1  (2 unrouted)
PG5  (1 unrouted)
PH3  (1 unrouted)
PH4  (1 unrouted)
PH5  (1 unrouted)
PJ0  (1 unrouted)
PJ1  (1 unrouted)
PJ2  (1 unrouted)
PJ3  (1 unrouted)
PJ4  (1 unrouted)
PJ5  (1 unrouted)
PJ6  (1 unrouted)
PL0  (1 unrouted)
PL1  (1 unrouted)
PL2  (1 unrouted)
PL3  (1 unrouted)
PL4  (1 unrouted)
PL5  (1 unrouted)
PL6  (1 unrouted)
PL7  (1 unrouted)
RESET  (4 unrouted)
VCC  (78 unrouted)